# EAGLE board AugmentedStethoscope_v5 (EAGLE 8.7.0)
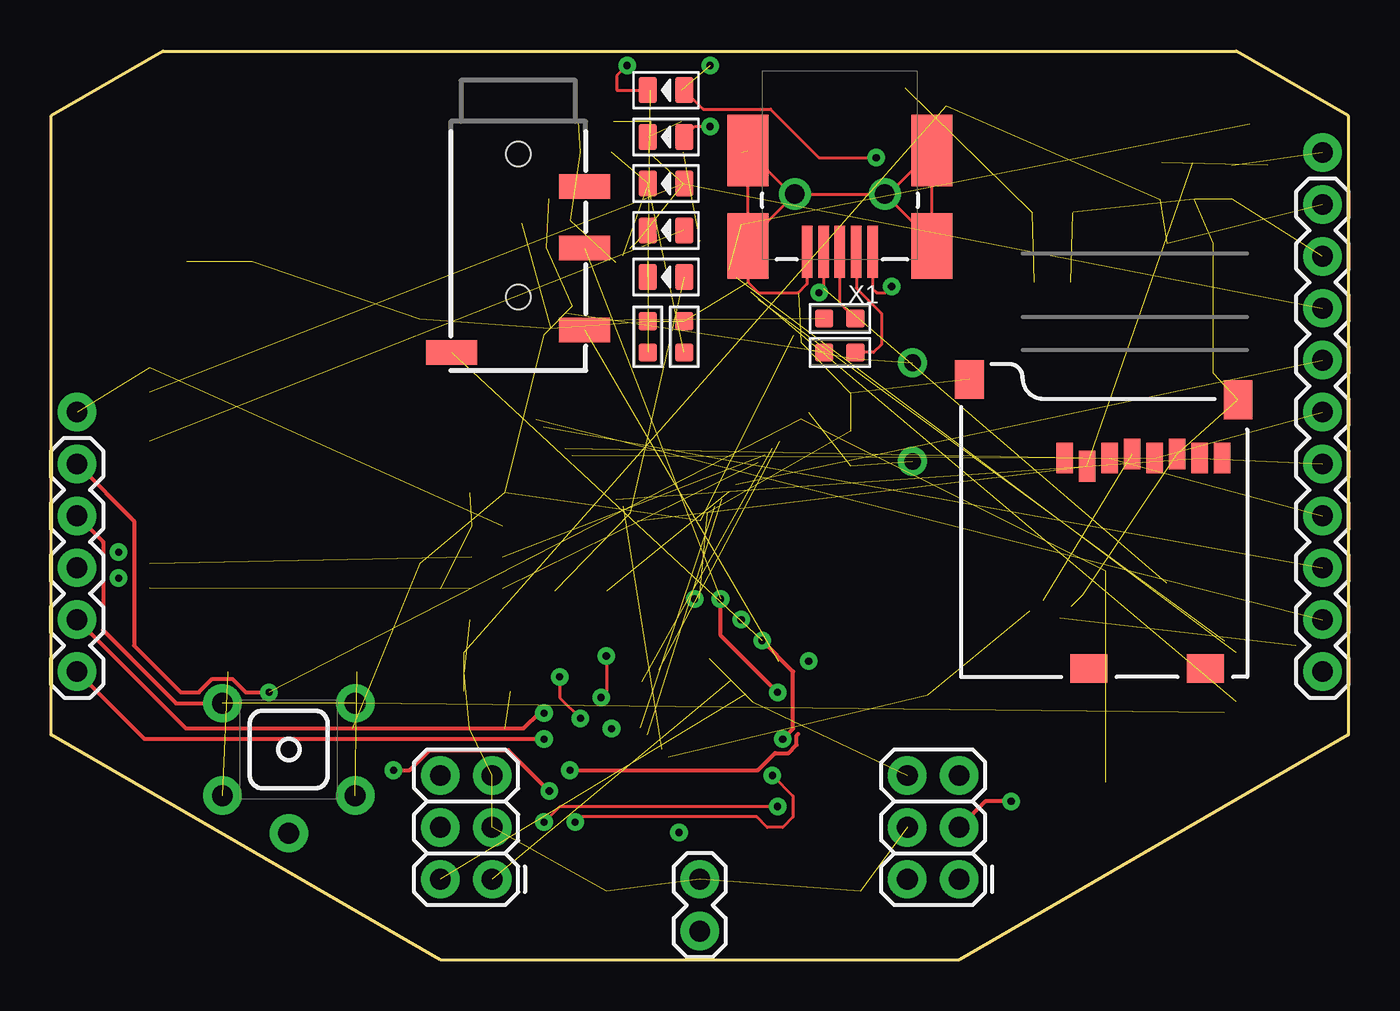
[diagram p0: board, top side]
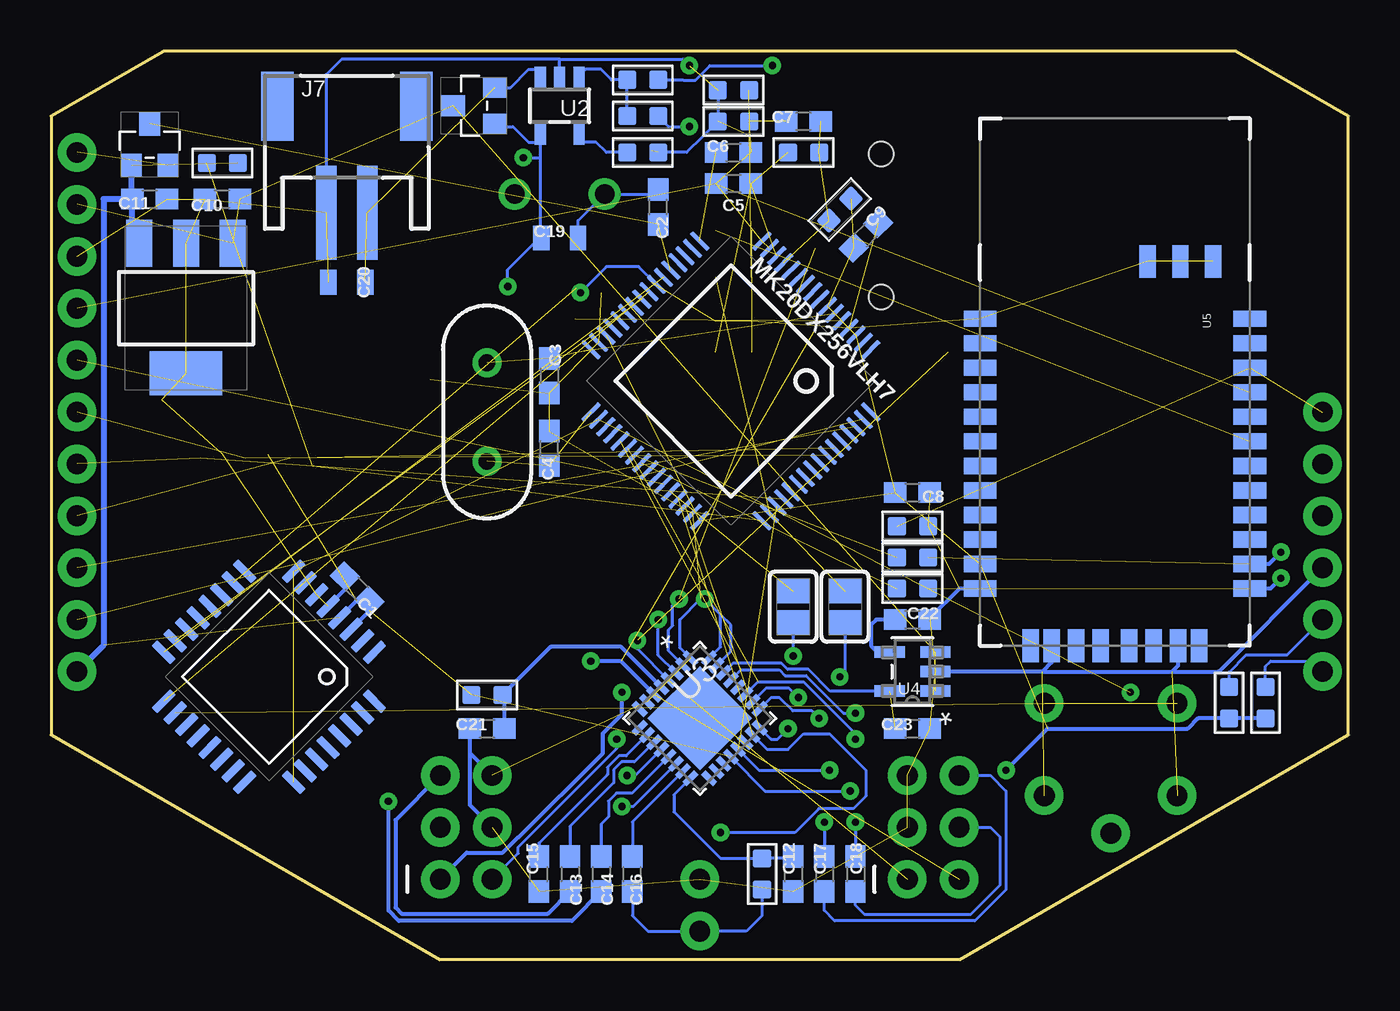
[diagram p1: board, bottom side, seen from below]

Size 63.5 x 44.45 mm. Coordinates in mm from the lower left corner, seen from the top.
Outline: 5.5,44.45 58,44.45 63.5,41.28 63.5,11 44.45,0 19.05,0 0,11 0,41.28 5.5,44.45
Copper layers (1*16): Top 0.035mm / dielectric 1.5mm / Bottom 0.035mm
Design rules "SparkFun *": minimum track width 6mil, minimum drill 6mil, track to track 6mil, track to pad 6mil, pad to pad 6mil, via to via 6mil, smd to smd 4mil, copper to edge 8mil, drill to drill 8mil, minimum pad ring 12mil, minimum via ring 10mil, stop-mask expansion 5mil, vias tented up to drill 25mil, thermal gap 8mil
Net classes: 0 default: width 0.254 mm, drill 0.203 mm, clearance 0.152 mm; 1 power: width 0.406 mm, drill 0.203 mm, clearance 0.203 mm

## Footprints (pad centres in the part's own frame; a part is rotated, then mirrored left to right if it is on the bottom)
0603 = smd 1.1 x 1: 1 -0.85,0; 2 0.85,0
0805 = smd 0.8 x 1.2: 1 -0.9,0; 2 0.9,0
FIDUCIAL_1MM = smd 1 x 1: 1 0,0
HC49US = drill 0.813: 1 -2.413,0; 2 2.413,0
1X05 = drill 1.016 pad 1.88: 1 0,0; 2 2.54,0; 3 5.08,0; 4 7.62,0; 5 10.16,0
2X3 = drill 1.016 pad 1.88: 1 0,0; 2 0,2.54; 3 2.54,0; 4 2.54,2.54; 5 5.08,0; 6 5.08,2.54
1X10 = drill 1.016 pad 1.88: 1 0,0; 2 2.54,0; 3 5.08,0; 4 7.62,0; 5 10.16,0; 6 12.7,0; 7 15.24,0; 8 17.78,0; 9 20.32,0; 10 22.86,0
1X02 = drill 1.016 pad 1.88: 1 0,0; 2 2.54,0
AUDIO_JACK_3.5MM_TRRS_SMD_RA = smd 1.2 x 2.5: EARTH 11.3,-3.25; RING1 6.2,3.25; RING2 3.2,3.25; TIP 10.2,3.25 | hole 1.2: 1.6,0; 8.6,0
JSTPH2 = smd 1 x 4.6: 1 -1,-3.7; 2 1,-3.7 | smd 1.6 x 3.4: NC1 -3.4,1.5; NC2 3.4,1.5
2X20 = drill 1.016 pad 1.88: 1 0,0; 2 0,2.54; 3 2.54,0; 4 2.54,2.54; 5 5.08,0; 6 5.08,2.54; 7 7.62,0; 8 7.62,2.54; 9 10.16,0; 10 10.16,2.54; 11 12.7,0; 12 12.7,2.54; 13 15.24,0; 14 15.24,2.54; 15 17.78,0; 16 17.78,2.54; 17 20.32,0; 18 20.32,2.54; 19 22.86,0; 20 22.86,2.54; 21 25.4,0; 22 25.4,2.54; 23 27.94,0; 24 27.94,2.54; 25 30.48,0; 26 30.48,2.54; 27 33.02,0; 28 33.02,2.54; 29 35.56,0; 30 35.56,2.54; 31 38.1,0; 32 38.1,2.54; 33 40.64,0; 34 40.64,2.54; 35 43.18,0; 36 43.18,2.54; 37 45.72,0; 38 45.72,2.54; 39 48.26,0; 40 48.26,2.54
1X01NS = drill 1.016 pad 1.88: 1 0,0
LQFP32-08 = smd 1.3 x 0.4: 1 -4.493,2.8; 2 -4.493,2; 3 -4.493,1.2; 4 -4.493,0.4; 5 -4.493,-0.4; 6 -4.493,-1.2; 7 -4.493,-2; 8 -4.493,-2.8; 17 4.493,-2.8; 18 4.493,-2; 19 4.493,-1.2; 20 4.493,-0.4; 21 4.493,0.4; 22 4.493,1.2; 23 4.493,2; 24 4.493,2.8 | smd 0.4 x 1.3: 9 -2.8,-4.493; 10 -2,-4.493; 11 -1.2,-4.493; 12 -0.4,-4.493; 13 0.4,-4.493; 14 1.2,-4.493; 15 2,-4.493; 16 2.8,-4.493; 25 2.8,4.493; 26 2,4.493; 27 1.2,4.493; 28 0.4,4.493; 29 -0.4,4.493; 30 -1.2,4.493; 31 -2,4.493; 32 -2.8,4.493
LQFP64-05 = smd 1.2 x 0.25: 1 -5.915,3.759; 2 -5.915,3.251; 3 -5.915,2.743; 4 -5.915,2.261; 5 -5.915,1.753; 6 -5.915,1.245; 7 -5.915,0.762; 8 -5.915,0.254; 9 -5.915,-0.254; 10 -5.915,-0.762; 11 -5.915,-1.245; 12 -5.915,-1.753; 13 -5.915,-2.261; 14 -5.915,-2.743; 15 -5.915,-3.251; 16 -5.915,-3.759; 33 5.915,-3.759; 34 5.915,-3.251; 35 5.915,-2.743; 36 5.915,-2.261; 37 5.915,-1.753; 38 5.915,-1.245; 39 5.915,-0.762; 40 5.915,-0.254; 41 5.915,0.254; 42 5.915,0.762; 43 5.915,1.245; 44 5.915,1.753; 45 5.915,2.261; 46 5.915,2.743; 47 5.915,3.251; 48 5.915,3.759 | smd 0.25 x 1.2: 17 -3.759,-5.915; 18 -3.251,-5.915; 19 -2.743,-5.915; 20 -2.261,-5.915; 21 -1.753,-5.915; 22 -1.245,-5.915; 23 -0.762,-5.915; 24 -0.254,-5.915; 25 0.254,-5.915; 26 0.762,-5.915; 27 1.245,-5.915; 28 1.753,-5.915; 29 2.261,-5.915; 30 2.743,-5.915; 31 3.251,-5.915; 32 3.759,-5.915; 49 3.759,5.915; 50 3.251,5.915; 51 2.743,5.915; 52 2.261,5.915; 53 1.753,5.915; 54 1.245,5.915; 55 0.762,5.915; 56 0.254,5.915; 57 -0.254,5.915; 58 -0.762,5.915; 59 -1.245,5.915; 60 -1.753,5.915; 61 -2.261,5.915; 62 -2.743,5.915; 63 -3.251,5.915; 64 -3.759,5.915
LED-0805 = smd 0.889 x 1.27: + -0.889,0; - 0.889,0
R0603 = smd 0.889 x 0.889: 1 0,0.762; 2 0,-0.762
SOT-23 = smd 1.016 x 1.143: 1 -0.889,-1.016; 2 0.889,-1.016; 3 0,1.016
L0603 = smd 0.889 x 0.889: 1 -0.762,0; 2 0.762,0
ALPS_SKHH = drill 1.016 pad 1.88: 1 -3.251,2.261; 2 3.251,2.261; 3 -3.251,-2.261; 4 3.251,-2.261; 5 0,-4.1
SOLDERJUMPER = smd 1.168 x 1.6: 1 -0.762,0; 2 0.762,0
SOT-223 = smd 1.27 x 2.286: 1 -2.286,-3.175; 2 0,-3.175; 3 2.286,-3.175 | smd 3.556 x 2.159: PAD 0,3.175
MICRO-SD-SOCKET-PP = smd 0.8 x 1.5: 1 -8.94,10.7; 2 -7.84,10.3; 3 -6.74,10.7; 4 -5.64,10.9; 5 -4.54,10.7; 6 -3.44,10.9; 7 -2.34,10.7; 8 -1.24,10.7 | smd 1.8 x 1.4: CD1 -7.75,0.4; CD2 -2.05,0.4 | smd 1.4 x 1.9: GND1 -13.6,14.55; GND2 -0.45,13.55
SOT23-5 = smd 0.55 x 1.2: 1 -0.95,-1.3; 2 0,-1.3; 3 0.95,-1.3; 4 0.95,1.3; 5 -0.95,1.3
QFN32 = smd 0.305 x 0.813: 1 1.75,2.4; 2 1.25,2.4; 3 0.75,2.4; 4 0.25,2.4; 5 -0.25,2.4; 6 -0.75,2.4; 7 -1.25,2.4; 8 -1.75,2.4; 17 -1.75,-2.4; 18 -1.25,-2.4; 19 -0.75,-2.4; 20 -0.25,-2.4; 21 0.25,-2.4; 22 0.75,-2.4; 23 1.25,-2.4; 24 1.75,-2.4 | smd 0.813 x 0.305: 9 -2.4,1.75; 10 -2.4,1.25; 11 -2.4,0.75; 12 -2.4,0.25; 13 -2.4,-0.25; 14 -2.4,-0.75; 15 -2.4,-1.25; 16 -2.4,-1.75; 25 2.4,-1.75; 26 2.4,-1.25; 27 2.4,-0.75; 28 2.4,-0.25; 29 2.4,0.25; 30 2.4,0.75; 31 2.4,1.25; 32 2.4,1.75 | smd 3.607 x 3.607: HTAB 0,0
DBV5 = smd 1.473 x 0.559: 1 -1.118,0.95; 2 -1.118,0; 3 -1.118,-0.95; 4 1.118,-0.95; 5 1.118,0.95
RN41 = smd 0.8 x 1.6: 1 -6.6,-6.6; 2 -5.4,-6.6; 3 -4.2,-6.6; 4 -3,-6.6; 5 -1.8,-6.6; 6 -0.6,-6.6; 7 0.6,-6.6; 8 1.8,-6.6; 9 3,-6.6; 10 4.2,-6.6; 11 5.4,-6.6; 12 6.6,-6.6; 13 6.6,6.6; 14 5.4,6.6; 15 4.2,6.6; 16 3,6.6; 17 1.8,6.6; 18 0.6,6.6; 19 -0.6,6.6; 20 -1.8,6.6; 21 -3,6.6; 22 -4.2,6.6; 23 -5.4,6.6; 24 -6.6,6.6 | smd 1.6 x 0.8: 25 -9.4,4.8; 26 -9.4,3.2; 27 -9.4,1.6; 28 9.4,3.1; 29 9.4,-3.1; 30 9.4,-4.122; 31 9.4,-1.9; 32 9.4,-0.7; 33 9.4,0.7; 34 9.4,1.9; 35 9.4,4.122
MOUNTINGHOLE_2.5_PLATED = drill 2.5 pad 3.2: P$1 0,0
MOLEX_SD-67503-010 = smd 2.54 x 0.508: 1 2.819,1.6; 2 2.819,0.8; 3 2.819,0; 4 2.819,-0.8; 5 2.819,-1.6 | smd 3.5 x 2: P$1 -2.121,-4.5; P$2 -2.121,4.5 | smd 3.2 x 2: P$3 2.544,-4.5; P$4 2.544,4.5 | drill 0.95: P$5 0,2.2; P$6 0,-2.2

## Placement (x,y rotation side)
C1  0.1uF  [0603]  48.51,18.15 135 bottom
C2  0.1uF  [0603]  33.78,36.82 90 bottom
C3  22pF  [0603]  39.12,28.57 270 bottom
C4  22pF  [0603]  39.12,25.01 90 bottom
C5  0.1uF  [0603]  30.1,37.97 180 bottom
C6  0.1uF  [0603]  30.1,39.49 0 bottom
C7  2.2uF  [0603]  26.67,41.01 180 bottom
C8  0.1uF  [0603]  21.34,22.85 0 bottom
C9  0.1uF  [0603]  23.62,35.43 45 bottom
C10  0.1uF  [0603]  55.12,37.2 180 bottom
C11  2.2uF  [0603]  58.67,37.2 0 bottom
C12  2.2uF  [0603]  27.18,4.18 270 bottom
C13  2.2uF  [0603]  38.1,4.18 270 bottom
C14  2.2uF  [0603]  36.58,4.18 270 bottom
C15  0.15uF  [0603]  39.62,4.18 90 bottom
C16  0.1uF  [0603]  35.05,4.18 90 bottom
C17  2.2uF  [0603]  25.65,4.18 270 bottom
C18  2.2uF  [0603]  24.13,4.18 270 bottom
C19  10uF  [0805]  38.61,35.3 180 bottom
C20  10uF  [0805]  49.02,33.14 0 bottom
C21  2.2uF  [0603]  42.16,11.3 180 bottom
C22  2.2uF  [0603]  21.34,16.63 0 bottom
C23  2.2uF  [0603]  21.34,11.3 180 bottom
FID1  FIDUCIAL""  [FIDUCIAL_1MM]  -14.48,13.84 0 top  (outside the outline)
FID2  FIDUCIAL""  [FIDUCIAL_1MM]  -18.03,13.84 0 top  (outside the outline)
G1  16MHz  [HC49US]  42.16,26.79 270 bottom
J1  [1X05]  1.27,14.09 90 top
J2  FEMALE 2x3  [2X3]  21.59,3.93 90 top
J3  FEMALE 2x3  [2X3]  44.45,3.93 90 top
J4  [1X10]  62.23,14.09 90 top
J5  [1X02]  31.75,3.93 270 top
J6  AUDIO_JACK_TRRSSMD_RA  [AUDIO_JACK_3.5MM_TRRS_SMD_RA]  22.86,41.01 270 top
J7  JSTPH  [JSTPH2]  49.02,40.25 0 bottom
J8  CONN_20X2  [2X20]  71.88,38.22 90 top  (outside the outline)
JP1  M01SMDNS  [1X01NS]  1.27,26.79 90 top
JP2  M01SMDNS  [1X01NS]  62.23,39.49 0 bottom
K1  MKL04Z32VLC4  [LQFP32-08]  52.83,13.84 225 bottom
K2  MK20DX256VLH7  [LQFP64-05]  30.23,28.31 225 bottom
P1  BLUE  [LED-0805]  30.1,33.39 180 top
P2  BLUE  [LED-0805]  30.1,37.97 180 top
P3  BLUE  [LED-0805]  30.1,35.68 180 top
P4  GREEN  [LED-0805]  30.1,40.25 180 top
P5  RED  [LED-0805]  30.1,42.54 180 top
R1  470  [R0603]  30.1,42.54 90 bottom
R2  470  [R0603]  30.99,30.47 0 top
R3  470  [R0603]  29.21,30.47 0 top
R4  10K  [R0603]  21.34,21.2 270 bottom
R5  [SOT-23]  58.67,39.87 0 bottom
R6  10K  [R0603]  21.34,19.68 90 bottom
R7  33  [R0603]  38.61,31.36 270 top
R8  33  [R0603]  38.61,29.71 270 top
R9  10K  [R0603]  21.34,18.15 90 bottom
R10  [L0603]  30.1,41.01 0 bottom
R11  470  [R0603]  26.67,39.49 270 bottom
R12  [L0603]  24.89,36.7 45 bottom
R13  2.2K  [R0603]  28.7,4.18 180 bottom
R14  10K  [R0603]  55.12,38.98 90 bottom
R15  470  [R0603]  34.54,41.27 270 bottom
R16  2.2K  [R0603]  34.54,39.49 270 bottom
R17  470  [R0603]  34.54,43.05 270 bottom
R18  [SOT-23]  42.8,41.78 90 bottom
R19  10K  [R0603]  4.06,12.57 0 bottom
R20  [L0603]  42.16,12.95 180 bottom
R21  10K  [R0603]  5.84,12.57 0 bottom
S1  [ALPS_SKHH]  11.63,10.28 0 top
SJ1  [SOLDERJUMPER]  27.18,17.26 90 bottom
SJ2  [SOLDERJUMPER]  24.64,17.26 90 bottom
T1  MCP1825S  [SOT-223]  56.9,31.87 180 bottom
U1  microSD  [MICRO-SD-SOCKET-PP]  58.55,13.84 0 top
U2  MCP73831T-2ACI/OT  [SOT23-5]  38.61,41.78 180 bottom
U3  SGTL5000XNAA3R2  [QFN32]  31.75,11.8 45 bottom
U4  TPS79318DBVR  [DBV5]  21.34,14.09 180 bottom
U5  BLUETOOTH-RN41  [RN41]  11.43,24.76 270 bottom
U$1  MOUNTINGHOLE2.5  [MOUNTINGHOLE_2.5_PLATED]  108.46,57.27 0 top  (outside the outline)
U$3  MOUNTINGHOLE2.5  [MOUNTINGHOLE_2.5_PLATED]  108.46,21.96 0 top  (outside the outline)
U$15  MOUNTINGHOLE2.5  [MOUNTINGHOLE_2.5_PLATED]  108.46,-13.34 0 top  (outside the outline)
X1  MINI-USB  [MOLEX_SD-67503-010]  38.61,37.46 270 top

## Library data of the parts
C1 C2 C5 C6 C8-C10 C15 C16 = SparkFun-Capacitors; PROD_ID: CAP-08604
C3 C4 = SparkFun-Capacitors; PROD_ID: CAP-07876
C7 C11-C14 C17 C18 C21-C23 = SparkFun-Capacitors; PROD_ID: CAP-07888
C19 C20 = SparkFun-Capacitors; PROD_ID: CAP-11330
FID1 FID2 U$1 U$3 U$15 = microbuilder; BOM: EXCLUDE
G1 = t32_ref; DESC: 16MHz / 18pF / 10ppm; MF: ABRACON; MPN: ABL-16.000MHz-B1U; OC_MOUSER: 815-ABL-16-B1U; PACKAGE: HC-49US; TYPE: Crystal
J1 J5 J8 = SparkFun-Connectors
J2 J3 = SparkFun-Connectors; PROD_ID: CONN-11566
J4 = SparkFun-Connectors; PROD_ID: CONN-11563
J6 = SparkFun-Connectors; PROD_ID: CONN-10676; SF_ID: PRT-12639
J7 U2 = microbuilder
JP1 JP2 U1 = SparkFun
K1 = t32_ref; DESC: MKL04Z32VLC4 (preprogrammed); MF: PJRC; MPN: IC_MKL04Z32_TQFP32; PACKAGE: LQFP-32; TYPE: Microcontroller
K2 = t32_ref; DESC: MK20DX256VLH7; MF: NXP; MPN: MK20DX256VLH7; OC_MOUSER: 841-MK20DX256VLH7; PACKAGE: LQFP-64; TYPE: Microcontroller
P1-P5 = t32_ref; DESC: orange; MF: ROHM Semiconductor; MPN: SML-211DTT86; OC_MOUSER: 755-SML-211DTT86; PACKAGE: 0805; TYPE: LED
R1-R4 R11 R13 R14 R16 R19 R21 = t32_ref; DESC: 470R / 1 % / 0.1 W; MF: Vishay; MPN: CRCW0603470RFKEA; OC_MOUSER: 71-CRCW0603-470-E3; PACKAGE: 0603; TYPE: Resistor
R5 R18 = t32_ref; DESC: Dual Schottky, common cat; MF: NXP Semiconductors; MPN: BAT54C,215; OC_MOUSER: 771-BAT54C-T/R; PACKAGE: SOT-23; TYPE: Diode
R6-R9 R15 R17 = t32_ref; DESC: 33R / 1% / 0.25 W; MF: Panasonic; MPN: ERJ-PA3F33R0V; OC_MOUSER: 667-ERJ-PA3F33R0V; PACKAGE: 0603; TYPE: Resistor
R10 R12 R20 = t32_ref; DESC: 600R / 100MHz; MF: Murata Electronics; MPN: BLM18AG601SN1D; OC_MOUSER: 81-BLM11A601S; PACKAGE: 0603; TYPE: Ferrite
S1 = t32_ref; DESC: SPST; MF: ALPS; MPN: SKHHPKA010; OC_MOUSER: 688-SKHHPK; PACKAGE: 6x6x5 MM; TYPE: Tactile switch
SJ1 SJ2 = t32_ref
T1 = t32_ref; DESC: 3.3V 500mA; MF: Microchip Technology; MPN: MCP1825S-3302E/DB; OC_MOUSER: 579-MCP1825S-3302EDB; PACKAGE: SOT-223-3; TYPE: Voltage regulator
U3 = pd3d_augmentedstethoscope; MANUFACTURER_PART_NUMBER: SGTL5000XNAA3R2; VENDOR: Freescale
U4 = pd3d_augmentedstethoscope; MANUFACTURER_PART_NUMBER: TPS79318DBVR; VENDOR: Texas Instruments
U5 = ScratchPad
X1 = t32_ref; DESC: MINI USB; MF: MOLEX; MPN: 0675031020; OC_MOUSER: 538-67503-1020; TYPE: Mini USB

## Nets
0/RX1: K2.39 R6.1
1/TX1: K2.40 R9.1
2: K2.57
3.3V [power]: C1.1 C8.1 C9.1 C11.1 J4.1 K1.3 K1.4 K2.3 K2.7 K2.30 K2.48 R5.1 R12.2 R14.2 R19.2 R20.2 R21.2 T1.3 U1.4 U3.20 U5.11
3/PWM: K2.28
4/PWM: K2.29
5/PWM: K2.64
6/PWM: K2.61
7/SPI_MOSI: J4.4 K2.59 U1.3
8: K2.60
9: K2.46 U3.24
10/SPI_CS: K2.49 R14.1 U1.2
11: K2.51 U3.21
12/SPI_MISO: J4.5 K2.52 U1.7
13/LED: K2.50 P1.+ SJ2.2
14/SPI_SCK: J4.6 K2.58 U1.5
15/A1: J4.7 K2.43
16/A2: K2.35
17/A3: K2.36
18/A4/SDA: J1.1 K2.38 R19.1 U3.27
19/A5/SCL: J1.2 K2.37 R21.1 U3.29
20/A6/SPI_CS: J4.3 K2.62
21/A7/SPI_CS: J4.2 K2.63
22/A8: K2.44 SJ1.2
23/A9: K2.45 U3.23
24: K2.27
25/PWM: K2.42
26/A15: K2.2
27/A16: K2.54
28/A17: K2.53
29/A18: K2.55
30/A19: K2.56
31/A20: K2.1
32/TOUCH: K2.41
33/TOUCH: K2.26
A12: K2.11
A13: K2.12
AGND: C5.2 C6.2 C7.2 J4.8 K2.15 K2.16 R10.2
D3: P2.- R2.2
D4: P3.- R3.2
D+: R7.1 X1.3
D-: R8.1 X1.2
DAC/A14: K2.18
DETECT: U1.CD2
GND [power]: C1.2 C2.2 C3.2 C4.2 C8.2 C9.2 C10.2 C11.2 C12.2 C15.1 C19.1 C20.1 C21.2 C22.2 C23.1 J1.3 J2.3 J2.5 J3.4 J3.6 J4.9 J5.1 J7.1 K1.5 K1.6 K2.4 K2.31 K2.47 P4.- R1.1 R2.1 R3.1 R4.1 R10.1 R16.1 S1.3 S1.4 T1.2 T1.PAD U1.6 U1.GND1 U1.GND2 U2.2 U3.1 U3.3 U3.7 U3.31 U3.32 U4.2 U5.1 U5.12 U5.25 U5.27 U5.28 U5.29 X1.5 X1.P$1 X1.P$2 X1.P$3 X1.P$4 X1.P$5 X1.P$6
HPGND: J2.1 J3.2 J6.EARTH U3.4
HPL: J2.2 J6.TIP U3.6
HPR: J3.1 J6.RING1 U3.2
ID: K1.10 K2.23 X1.4
LIL: C18.2 J2.4
LIL_ISO: C18.1 U3.14
LIR: C14.2 J3.3
LIR_ISO: C14.1 U3.13
LOL: C17.2 J2.6
LOL_ISO: C17.1 U3.12
LOR: C13.2 J3.5
LOR_ISO: C13.1 U3.11
MIC: C16.1 J5.2 R13.1
MIC_BIAS: C12.1 R13.2 U3.16
N$1: C20.2 J7.2 R18.2 U2.3
N$2: K1.16 K2.22
N$3: K1.17 K2.24
N$4: C15.2 U3.10
N$5: C3.1 G1.1 K2.32
N$6: C4.1 G1.2 K2.33
N$7: C5.1 K2.14 R11.2
N$8: C22.1 U4.4
N$9: SJ1.1 U3.26
N$10: K2.5 R7.2
N$11: C6.1 K2.17
N$12: C23.2 U3.30 U4.5
N$13: SJ2.1 U3.25
N$14: K2.6 R8.2
N$15: C16.2 U3.15
N$16: P3.+ U5.19
N$17: C7.1 K2.13 R11.1 R12.1
N$52: P1.- R1.2
N$68: C2.1 K2.21 R5.3
N$70: K1.15 K2.25
N$71: P5.- R17.1
N$72: R15.2 R17.2 U2.1
N$73: P2.+ U5.21
N$75: R16.2 U2.5
N$76: P4.+ R15.1
N$79: C21.1 R20.1 U3.5
PIO4: JP1.1 R4.2 U5.22
PROG: J1.4 K1.18 S1.1 S1.2
RESET: J1.5 K1.8 K1.25 K2.34
SMIRF_CTS: U5.16
SMIRF_RTS: U5.15
SMIRF_RX: R9.2 U5.13
SMIRF_TX: R6.2 U5.14
V_USB [power]: C19.2 P5.+ R18.1 U2.4 X1.1
VIN [power]: C10.1 J4.10 R18.3 T1.1 U4.1 U4.3
VRTC: JP2.1 R5.2

## Tracks (layer width: path | path; a pad name or v marks a point on that pad's centre or on a via)
0/RX1  (1 unrouted)
1/TX1  (1 unrouted)
3.3V  (via drill 0.35)  (13 unrouted)
  Top 0.2: v16.76,9.26 17.55,9.26 18.54,10.25 22.38,10.25 v24.38,8.25
  Bottom 0.152: U3.20 28.55,8.25 v24.38,8.25
  Bottom 0.2: R19.2 R21.2 7.36,11.8 7.87,11.3 14.73,11.3 v16.76,9.26
  Bottom 0.203: K1.3 47.91,17.06 C1.1 48.55,17.55 K1.4
  Bottom 0.305: R5.1 59.56,37.24 C11.1 | C11.1 59.52,35.39 T1.3 | C11.1 60.94,37.2 60.94,15.38 J4.1
7/SPI_MOSI  (2 unrouted)
9  (via drill 0.35)  (1 unrouted)
  Bottom 0.152: U3.24 28.26,10.79 27.94,10.79 v27.43,11.3
10/SPI_CS  (2 unrouted)
11  (via drill 0.35)  (1 unrouted)
  Top 0.2: 36.58,11.04 36.49,10.96 36.49,10.51 36.1,10.11 35.44,10.11 34.6,9.26 v25.4,9.26
  Bottom 0.152: U3.21 28.86,9.26 v25.4,9.26
12/SPI_MISO  (2 unrouted)
13/LED  (2 unrouted)
14/SPI_SCK  (2 unrouted)
15/A1  (1 unrouted)
18/A4/SDA  (via drill 0.35)  (1 unrouted)
  Top 0.2: v24.13,10.79 4.57,10.79 J1.1
  Bottom 0.152: v24.13,10.79 24.13,11.04 26.67,13.58 28.91,13.58 U3.27 | R19.1 4.06,14.34 3.81,14.6 1.78,14.6 J1.1
19/A5/SCL  (via drill 0.35)  (1 unrouted)
  Top 0.2: v24.13,12.06 23.88,12.06 23.11,11.3 6.6,11.3 J1.2
  Bottom 0.152: v24.13,12.06 24.71,12.06 26.55,13.89 27.58,13.89 27.86,14.17 29.74,14.17 U3.29 | J1.2 3,14.9 5,14.9 5.84,14.06 R21.1
20/A6/SPI_CS  (1 unrouted)
21/A7/SPI_CS  (1 unrouted)
22/A8  (1 unrouted)
23/A9  (via drill 0.35)  (1 unrouted)
  Bottom 0.152: U3.23 28.46,10.28 27.43,10.28 26.67,11.04 25.4,11.04 23.62,9.26 23.62,7.99 24.23,7.38 25.93,7.38 27.09,6.22 v30.73,6.22
AGND  (6 unrouted)
D3  (1 unrouted)
D4  (1 unrouted)
D+
  Top 0.152: R7.1 38.61,32.12 X1.3
D-
  Top 0.152: X1.2 39.41,32.85 40.64,31.62 40.64,30.09 40.26,29.71 R8.1
GND  (via drill 0.35)  (41 unrouted)
  Top 0.152: X1.5 37.01,33.06 36.58,32.63 34.62,32.63 34.11,33.14 X1.P$3 | X1.P$3 X1.P$1 36.23,37.46 X1.P$6 | X1.P$5 40.99,37.46 X1.P$2 X1.P$4 43.11,35.16 X1.P$5 | X1.P$3 34.11,35.16 X1.P$6 | X1.P$6 X1.P$5
  Bottom 0.152: U3.3 33.78,14.9 v33.78,16.63 | U3.1 32.72,15.25 32.72,16.63 31.7,17.65 v31.5,17.65 30.73,16.88 | U3.32 30.73,15.29 30.73,16.88 | U3.31 30.23,15.1 30.23,16.38 30.73,16.88 | C2.2 34,37.46 X1.P$6 37.71,36.16 C19.1 | U2.2 38.61,44.06 | 38.61,44.06 32.58,44.06 v32.26,43.74 | R16.1 32.39,39.49 31.61,40.27 R10.1 R1.1 | 38.61,44.06 49.28,44.06 50.04,43.3 50.04,36.57 J7.1
  Bottom 0.2: J3.6 43.01,10.11 C21.2 43.01,7.57 J3.4 | 14.99,14.09 U4.2 | U5.12 19.05,18.15 20.49,16.72 C22.2 | U5.29 14.53,14.55 14.99,14.09 | 14.99,14.09 8.64,14.09 | 8.64,14.09 8.33,14.4 U5.28 | 8.64,14.09 6.35,14.09 J1.3
  Bottom 0.203: K1.5 49.11,18.12 C1.2
HPGND  (via drill 0.35)  (2 unrouted)
  Top 0.2: v35.81,10.79 36.32,11.3 36.32,14.09 v34.8,15.61
  Bottom 0.152: J3.2 40.64,5.2 40.64,5.5 35.81,10.32 v35.81,10.79 | U3.4 34.8,15.21 v34.8,15.61
HPL  (via drill 0.35)  (2 unrouted)
  Bottom 0.2: U3.6 35.6,14.6 v37.08,14.6
HPR  (via drill 0.35)  (1 unrouted)
  Top 0.2: v35.56,13.07 32.77,15.87 v32.77,17.65
  Bottom 0.152: U3.2 33.27,15.11 33.27,16.14 33.07,16.34 33.07,17.34 v32.77,17.65
  Bottom 0.2: J3.1 43.15,5.23 41.39,5.23 40.66,5.96 40.64,5.96 36.49,10.11 36.49,11.07 35.56,12.01 v35.56,13.07
ID  (via drill 0.35)  (1 unrouted)
  Top 0.152: X1.4 37.81,32.85 v37.59,32.63
  Bottom 0.152: v37.59,32.63 36.32,33.9 34.74,33.9 K2.23
LIL
  Bottom 0.152: J2.4 17.53,6.47 17.07,6.01 17.07,3.62 18.49,2.2 23.67,2.2 24.13,2.66 C18.2
LIL_ISO  (via drill 0.35)
  Top 0.152: v35.56,7.49 24.89,7.49 v24.13,6.72
  Bottom 0.152: U3.14 35.01,7.49 v35.56,7.49 | v24.13,6.72 C18.1
LIR  (via drill 0.35)
  Top 0.2: v46.99,7.74 45.72,7.74 J3.3
  Bottom 0.2: C14.2 38.01,1.9 46.48,1.9 46.99,2.41 v46.99,7.74
LIR_ISO
  Bottom 0.152: C14.1 36.58,6.62 36.22,6.98 36.22,7.76 35.83,8.14 35.06,8.14 U3.13
LOL
  Bottom 0.152: J2.6 17.53,9.01 16.76,8.25 16.76,3.42 18.29,1.9 25.15,1.9 25.65,2.41 C17.2
LOL_ISO  (via drill 0.35)
  Top 0.152: v35.31,9.01 36.32,7.99 36.32,6.98 35.81,6.47 35.05,6.47 34.54,6.98 25.91,6.98 v25.65,6.72
  Bottom 0.152: U3.12 34.9,9.01 v35.31,9.01 | v25.65,6.72 C17.1
LOR
  Bottom 0.2: C13.2 39.18,2.25 46.34,2.25 46.64,2.55 46.64,6.82 J3.5
LOR_ISO
  Bottom 0.152: C13.1 38.1,6.51 35.96,8.65 35.96,9.28 35.58,9.67 34.95,9.67 U3.11
MIC
  Bottom 0.152: R13.1 28.7,2.15 29.46,1.39 J5.2 34.29,1.39 35.05,2.15 C16.1
MIC_BIAS
  Bottom 0.152: C12.1 27.27,4.95 R13.2 30.73,4.95 33.02,7.23 33.02,8.06 U3.16
N$1  (2 unrouted)
  Bottom 0.152: R18.2 41.02,42.66 40.13,43.55 39.62,43.55 39.56,43.49 U2.3
N$2  (1 unrouted)
N$3  (1 unrouted)
N$4
  Bottom 0.152: C15.2 39.62,5.7 36.27,9.05 36.27,9.41 35.7,9.97 35.35,9.97 U3.10
N$5  (2 unrouted)
N$6  (2 unrouted)
N$7  (2 unrouted)
N$8
  Bottom 0.2: C22.1 23.11,16.63 23.37,16.38 23.37,15.36 23.05,15.04 U4.4
N$9  (via drill 0.35)
  Top 0.152: v27.18,14.85 27.18,13.07 v26.92,12.82
  Bottom 0.152: SJ1.1 v27.18,14.85 | v26.92,12.82 27.38,13.28 28.51,13.28 U3.26
N$10  (1 unrouted)
N$11  (1 unrouted)
N$12  (1 unrouted)
  Bottom 0.152: U4.5 25.37,13.14 26.42,14.19 27.45,14.19 27.77,14.51 30.1,14.51 U3.30
N$13  (via drill 0.35)
  Top 0.152: v24.89,13.84 24.89,12.82 v25.91,11.8
  Bottom 0.152: SJ2.1 24.64,14.09 v24.89,13.84 | v25.91,11.8 26.27,12.16 27.2,12.16 27.85,12.82 28.26,12.82 U3.25
N$14  (1 unrouted)
N$15
  Bottom 0.152: U3.15 35.05,6.73 C16.2
N$16  (1 unrouted)
N$17  (3 unrouted)
N$52  (1 unrouted)
N$68  (2 unrouted)
N$70  (1 unrouted)
N$71  (via drill 0.35)
  Top 0.152: v28.19,43.74 27.69,43.23 27.69,42.54 P5.-
  Bottom 0.152: v28.19,43.74 31.26,43.74 31.96,43.03 32.55,43.03 32.56,43.05 R17.1
N$72
  Bottom 0.152: U2.1 37.66,43.23 37.34,43.55 36.58,43.55 36.07,43.05 R17.2 R15.2
N$73  (1 unrouted)
N$75
  Bottom 0.152: R16.2 36.32,39.49 36.83,40 37.59,40 37.66,40.06 U2.5
N$76  (via drill 0.35)
  Top 0.152: v32.26,40.76 31.5,40.76 P4.+
  Bottom 0.152: R15.1 33.27,40.76 v32.26,40.76
N$79
  Bottom 0.2: U3.5 35.6,15.3 39.05,15.3 R20.1 41.31,12.86 C21.1
PIO4  (2 unrouted)
PROG  (2 unrouted)
  Top 0.2: J1.4 2.54,20.44 2.54,16.12 6.12,12.54 S1.1
RESET  (via drill 0.35)  (3 unrouted)
  Top 0.2: J1.5 4.06,21.46 4.06,15.36 6.35,13.07 7.23,13.07 7.89,13.73 8.88,13.73 9.54,13.07 v10.67,13.07
SMIRF_RX  (via drill 0.35)  (1 unrouted)
  Bottom 0.2: U5.13 3.81,18.16 v3.3,18.66
SMIRF_TX  (via drill 0.35)  (1 unrouted)
  Bottom 0.2: U5.14 3.88,19.36 v3.3,19.93
V_USB  (via drill 0.35)
  Top 0.152: X1.1 40.21,32.81 40.39,32.63 40.85,32.63 v41.15,32.93 | v40.39,39.24 37.6,39.24 35.22,41.61 31.92,41.61 P5.+
  Bottom 0.152: U2.4 39.56,40 | 39.56,40 39.56,39.24 | 39.56,39.24 39.56,35.35 | 39.56,35.35 C19.2 | R18.1 41.66,40.76 40.89,40.76 40.13,40 39.56,40 | v41.15,32.93 41.15,33.76 39.56,35.35 | v40.39,39.24 39.56,39.24
VIN  (5 unrouted)
VRTC  (1 unrouted)